# Altium PCB 电源板5.PcbDoc (part 3 of 3)
Units mm, origin at the board's own origin, x right, y up, seen from the top; angles counter-clockwise.
Board outline 181.19 x 72.37 mm, 2 copper layers (Top Layer, Bottom Layer), stack 0.325 mm thick; 121 components, 93 nets, 519 pads, 51 vias.
Unrouted connection lines stored in the file: 1.
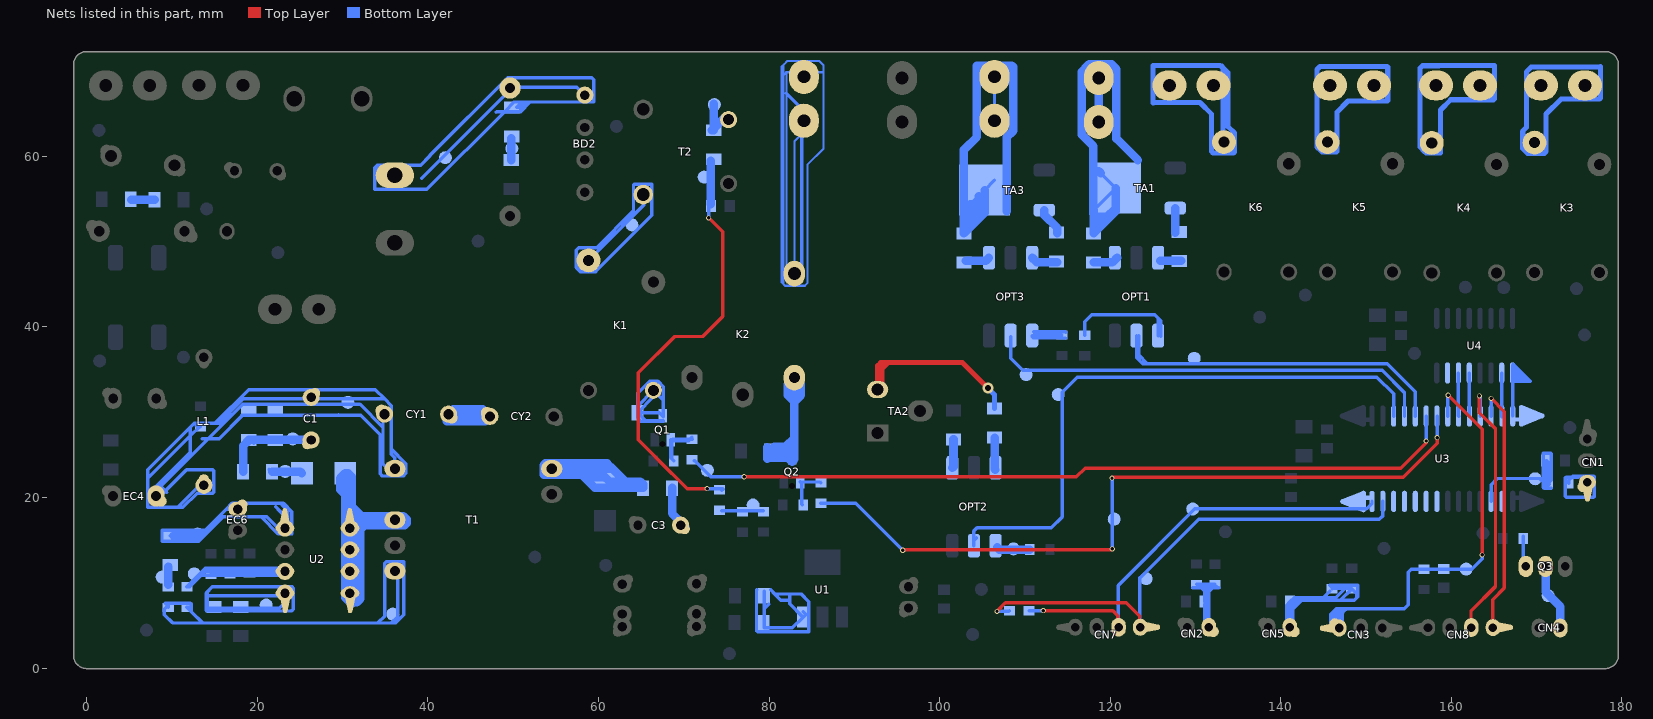
[diagram p3: the nets of this part, all layers, seen from the top]

## Via types
v1: diameter 0.6, hole 0.4, Top Layer to Bottom Layer, 44 vias
v2: diameter 1.27, hole 0.711, Top Layer to Bottom Layer, 7 vias

## Nets (pads, with @x,y where several pads share a name; then routed paths per layer and width w, separated by ;. In a path a pad name is that pad's centre, name@x,y a point inside that pad or via, vN(x,y) a via of type N, cw(c..) or ccw(c..) an arc to the next point about the centre after c; other vN are vias at no path point) (continued)
NetBD2_4: BD2.4 CN9.2 CX2.2 pad.2@42.04,59.846 R7.1 | length 97.9
  Bottom Layer w0.4: 33.927,58.442 33.927,58.825 ; 39.263,57.453 49.931,68.121 57.47,68.121 BD2.4@58.405,67.186 ; 47.982,65.182 48.057,65.257 R7.1@48.987,65.257 ; 33.927,58.825 33.763,58.661 33.763,56.148 39.877,56.148 R7.1@48.987,65.257 ; 33.927,58.825 34.058,58.956 39.144,58.956 40.243,60.056 40.243,60.133 49.339,69.228 59.21,69.228 59.432,69.006 59.432,66.424 59.393,66.385 51.997,66.385 ; R7.1@48.987,65.257 50.115,66.385 51.05,66.385 ; R7.1@48.987,65.257 50.869,65.257 ; 50.869,65.257 51.997,66.385 ; 50.869,65.257 50.869,65.745 ; 50.869,65.745 50.869,65.753 50.924,65.808 50.924,65.857 51.191,66.124 51.198,66.124 51.198,66.237 51.05,66.385 ; 50.869,65.745 50.41,65.745 51.05,66.385 ; 50.869,65.745 51.111,65.745 51.751,66.385 ; 51.05,66.385 51.751,66.385 ; 51.751,66.385 51.997,66.385
NetC1_1: C1.1 pad.2@24.141,26.878 R2.2 R3.2 R10.1 | length 11.6
  Bottom Layer w0.4: R3.2@19.201,26.722 R3.2@19.562,26.362
  Bottom Layer w1: R10.1@18.321,23.031 18.321,26.049 R3.2@18.994,26.722 19.018,26.746 R2.2@22.108,26.746 25.568,26.746 C1.1@25.952,26.362
NetC1_2: C1.2 CY1.1 EC4.1 L1.2@13.732,21.427 L1.2@13.732,21.927 pad.2@30.615,31.158 R2.1 R3.1 R6.2 T1.1 | length 192.1
  Bottom Layer w0.254: EC4.1@8.111,20.173 EC4.1@8.111,20.746
  Bottom Layer w0.4: EC4.1@7.606,20.746 EC4.1@7.936,20.746 ; 9.378,20.584 9.209,20.753 8.95,21.012 8.65,21.313 ; R6.2@13.305,28.304 R6.2@13.216,28.304 ; 13.534,26.9 14.237,26.9 ; L1.2@13.732,20.479 L1.2@13.732,20.501 ; R3.1@18.15,29.627 R3.1@18.253,29.627 ; 23.281,29.627 R2.1@22.108,29.627 ; 29.511,29.713 29.425,29.627 ; CY1.1@34.728,29.991 34.728,28.241 ; T1.1@35.795,22.883 34.728,23.95 34.728,28.241 ; T1.1@36.124,23.378 36.124,24.667 35.707,25.084 35.707,25.683 ; 7.153,22.242 12.137,27.226 ; 7.153,22.242 7.153,23.26 12.137,28.243 ; 7.153,22.242 7.153,18.865 7.171,18.847 8.143,18.847 ; EC4.1@7.936,20.746 7.936,21.102 8.552,21.719 ; EC4.1@7.936,20.746 8.111,20.746 8.111,20.775 8.65,21.313 ; EC4.1@7.936,20.746 7.936,19.997 EC4.1@8.111,20.173 ; EC4.1@8.111,20.173 8.629,20.173 11.688,23.232 14.772,23.232 14.88,23.124 14.88,21.447 ; EC4.1@8.111,20.173 8.111,18.879 8.143,18.847 ; 8.143,18.847 10.653,18.847 ; 8.552,21.719 8.552,21.41 8.65,21.313 ; 8.552,21.719 12.137,25.303 12.137,27.226 ; 8.65,21.313 14.237,26.9 ; 10.653,18.847 L1.2@13.732,21.927 L1.2@13.732,21.427 ; 10.653,18.847 11.269,18.847 12.924,20.501 L1.2@13.732,20.501 ; 12.137,27.226 R6.2@13.216,28.304 ; 12.137,27.226 12.137,28.243 ; 12.137,28.243 12.582,28.689 ; 12.582,28.689 12.966,28.304 R6.2@13.216,28.304 ; 12.582,28.689 15.002,28.689 ; L1.2@13.732,20.501 L1.2@13.732,21.427 ; L1.2@13.732,20.501 14.755,20.501 14.88,20.627 14.88,21.447 ; L1.2@13.732,21.427 14.86,21.427 14.88,21.447 ; 14.237,26.9 15.526,26.9 R3.1@18.253,29.627 ; 14.237,26.9 15.691,28.354 ; 15.002,28.689 18.972,32.658 33.83,32.658 34.922,31.566 ; 15.002,28.689 15.445,28.689 ; 15.445,28.689 18.323,31.566 34.922,31.566 ; 15.445,28.689 15.691,28.689 ; 15.691,28.354 15.691,28.689 ; 15.691,28.354 16.025,28.689 ; 15.691,28.689 16.025,28.689 ; 16.025,28.689 18.267,30.931 32.038,30.931 34.728,28.241 ; R3.1@18.253,29.627 R2.1@22.108,29.627 ; R2.1@22.108,29.627 29.425,29.627 ; 29.425,29.627 32.104,29.627 34.391,27.34 34.391,22.776 34.649,22.518 37.116,22.518 37.425,22.827 37.425,23.965 35.707,25.683 ; 34.922,31.566 35.707,30.781 35.707,25.683
NetC3_1: C3.1 R9.2 | length 5.2
  Bottom Layer w1: R9.2@68.631,21.159 68.631,18.129 C3.1@70.187,16.573
NetC4_2: C4.2 pad.2@12.598,11.048 R14.2 R17.2 R18.2 U2.3 | length 44.8
  Bottom Layer w0.4: R17.2@14.539,11.009 U2.3@22.912,11.009 ; C4.2@19.093,11.236 19.648,11.236 C4.2@19.743,11.331 ; 13.422,10.86 R17.2@13.892,11.331 ; 13.422,10.86 12.089,9.528 R14.2@11.723,9.528 13.526,11.331 ; 13.422,10.86 22.764,10.86 U2.3@22.912,11.009 ; 13.526,11.331 R17.2@13.892,11.331 ; 13.526,11.331 13.888,11.693 20.105,11.693 ; R17.2@13.892,11.331 C4.2@19.743,11.331 ; C4.2@19.743,11.331 20.105,11.693 ; C4.2@19.743,11.331 U2.3@23.234,11.331 ; 20.105,11.693 22.873,11.693 U2.3@23.234,11.331 ; U2.3@22.912,11.009 U2.3@23.234,11.331
NetC5_2: C5.2 CN2.2@131.592,4.771 CN2.2@132.031,4.347 R19.1 R21.1 | length 23.2
  Bottom Layer w0.4: R19.1@129.679,9.399 R19.1@130.715,9.399 ; R19.1@130.137,9.802 R19.1@130.312,9.802 ; C5.2@131.099,7.476 131.099,5.279 CN2.2@131.592,4.787 ; C5.2@131.112,7.776 C5.2@131.112,8.45 ; 131.309,6.661 131.358,6.613 ; CN2.2@131.592,4.771 CN2.2@131.592,4.787 ; CN2.2@132.031,4.347 CN2.2@131.723,4.655 ; R21.1@132.286,9.792 132.276,9.802 R21.1@131.854,9.802 ; R21.1@132.53,9.516 R21.1@132.53,9.399 ; R21.1@132.739,9.399 R21.1@132.53,9.399 ; R19.1@130.312,9.802 R19.1@130.715,9.399 ; R19.1@130.312,9.802 131.148,9.802 ; R19.1@130.715,9.399 131.112,9.002 ; R19.1@130.715,9.399 131.112,9.399 ; C5.2@131.112,8.45 131.112,9.002 ; C5.2@131.112,8.45 131.358,8.696 ; 131.112,9.002 131.112,9.399 ; 131.112,9.399 131.112,9.766 131.148,9.802 ; 131.112,9.399 131.314,9.399 ; 131.148,9.802 R21.1@131.854,9.802 ; 131.314,9.399 131.358,9.355 131.358,8.696 ; 131.314,9.399 131.592,9.399 ; 131.358,6.613 131.592,6.379 ; 131.358,6.613 131.358,5.93 CN2.2@131.592,5.697 ; 131.358,6.613 131.358,8.696 ; 131.358,8.696 131.592,8.929 ; CN2.2@131.592,4.786 131.599,4.779 CN2.2@131.723,4.655 ; CN2.2@131.592,4.786 131.723,4.918 CN2.2@131.723,4.655 ; CN2.2@131.592,4.787 CN2.2@131.592,5.697 ; CN2.2@131.592,5.697 131.592,6.379 ; 131.592,6.379 131.592,8.929 ; 131.592,8.929 131.592,9.399 ; 131.592,8.929 R21.1@132.061,9.399 ; 131.592,9.399 131.592,9.539 R21.1@131.854,9.802 ; 131.592,9.399 R21.1@132.061,9.399 ; R21.1@132.061,9.399 R21.1@132.53,9.399
NetC6_2: C6.2 CN5.2@141.074,4.761 CN5.2@141.514,4.337 R20.1 R22.1 | length 42.4
  Bottom Layer w0.4: CN5.2@141.074,4.439 CN5.2@141.074,4.761 ; CN5.2@141.514,4.337 141.09,4.761 CN5.2@141.074,4.761 ; 145.34,8.55 145.289,8.55 ; R22.1@145.761,9.022 145.289,8.55 ; R22.1@146.033,9.303 R22.1@146.033,9.378 ; 147.601,9.382 147.597,9.378 ; CN5.2@141.074,4.761 C6.2@141.074,7.75 ; CN5.2@141.074,4.761 140.711,5.125 140.711,7.387 C6.2@141.074,7.75 ; CN5.2@141.074,4.761 141.443,5.13 141.443,6.896 ; C6.2@141.074,7.75 C6.2@141.112,7.788 ; C6.2@141.112,7.788 C6.2@141.443,7.457 ; C6.2@141.112,7.788 C6.2@141.21,7.886 ; C6.2@141.21,7.886 141.584,8.26 142.627,8.26 ; C6.2@141.21,7.886 C6.2@141.641,7.886 ; 141.443,6.896 C6.2@141.443,7.457 ; 141.443,6.896 142.489,7.942 ; C6.2@141.443,7.457 141.643,7.457 142.073,7.886 ; C6.2@141.641,7.886 141.697,7.942 142.309,7.942 ; C6.2@141.641,7.886 142.073,7.886 ; 142.073,7.886 142.253,7.886 142.309,7.942 ; 142.309,7.942 142.489,7.942 ; 142.309,7.942 142.627,8.26 ; 142.489,7.942 142.808,8.26 ; 142.489,7.942 143.315,7.942 ; 142.627,8.26 142.808,8.26 ; 142.808,8.26 142.996,8.26 ; 142.996,8.26 143.315,7.942 ; 142.996,8.26 144.999,8.26 ; 143.315,7.942 144.681,7.942 ; 144.681,7.942 144.999,8.26 ; 144.681,7.942 147.018,7.942 ; 144.999,8.26 145.289,8.55 ; 144.999,8.26 146.479,8.26 147.597,9.378 ; R22.1@146.033,9.378 147.597,9.378 ; R22.1@146.033,9.378 146.033,9.437 145.754,9.716 149.067,9.716 149.067,8.375 148.941,8.25 ; 147.018,7.942 R20.1@148.346,9.27 ; 147.018,7.942 148.633,7.942 148.941,8.25 ; 147.597,9.378 148.239,9.378 R20.1@148.346,9.27 ; R20.1@148.346,9.27 R20.1@148.346,9.281 148.941,8.686 148.941,8.25
NetC10_2: C10.2 D6.K pad.2@72.397,57.574 R32.1 | length 52
  Top Layer w0.4: v1(72.742,21.043) 70.408,21.043 68.651,22.8 68.624,22.8 64.653,26.771 64.653,34.604 68.93,38.882 72.211,38.882 74.557,41.228 74.557,51.155 v1(72.923,52.79)
  Bottom Layer w0.4: v1(72.742,21.043) 74.571,21.043 74.628,20.986 R32.1@74.472,20.829 ; v1(72.923,52.79) 72.924,52.791 C10.2@72.924,54.15 ; D6.K@73.145,59.506 D6.K@73.307,59.667
  Bottom Layer w1: C10.2@73.145,54.372 D6.K@73.145,59.506
NetCN1_1: CN1.1 R42.1 | length 13.1
  Bottom Layer w0.4: R42.1@173.807,21.681 173.807,22.029 174.171,22.393 ; 174.92,22.393 174.171,22.393 ; 174.171,22.393 173.465,22.393 173.396,22.324 173.396,20.13 173.517,20.009 176.692,20.009 176.788,20.105 176.788,22.452 176.752,22.488 174.265,22.488 174.171,22.393
NetCN4_2: CN4.2 pad.2@171.365,8.495 Q3.C | length 7.9
  Bottom Layer w1: Q3.C@171.066,11.917 171.066,8.941 172.795,7.212 CN4.2@172.795,4.7
NetCY1_2: CY1.2 CY2.1 | length 17.3
  Bottom Layer w0.4: CY2.1@46.821,29.771 CY2.1@46.934,29.884
  Bottom Layer w1: CY2.1@46.821,29.771 CY1.2@42.416,29.771 ; CY1.2@42.416,29.771 42.98,30.336 46.434,30.336 46.91,29.86 CY2.1@47.267,29.503 46.718,28.954 CY1.2@43.233,28.954 ; CY1.2@42.416,29.771 42.416,29.137 42.233,28.954 CY1.2@43.233,28.954 ; CY1.2@42.416,29.771 CY1.2@43.233,28.954
NetD1_A: D1.A R9.1 T1.10 | length 52
  Bottom Layer w0.4: D1.A@60.139,23.378 D1.A@61.089,22.428
  Bottom Layer w1: T1.10@53.594,23.378 53.572,23.401 53.572,23.799 53.771,23.998 61.013,23.998 D1.A@61.633,23.378 ; T1.10@53.594,23.378 T1.10@54.524,23.378 ; T1.10@53.594,23.378 53.594,22.663 53.583,22.652 58.052,22.652 ; T1.10@54.524,23.378 54.947,22.956 54.947,22.805 56.355,22.805 56.371,22.822 57.883,22.822 ; T1.10@54.524,23.378 57.326,23.378 ; 57.326,23.378 57.883,22.822 ; 57.326,23.378 D1.A@59.772,23.378 ; 57.883,22.822 D1.A@60.329,22.822 ; 57.883,22.822 58.052,22.652 ; 58.052,22.652 58.933,22.652 59.286,22.299 59.353,22.367 D1.A@60.783,22.367 ; 58.052,22.652 59.545,21.159 D1.A@61.991,21.159 ; D1.A@59.772,23.378 D1.A@60.329,22.822 ; D1.A@59.772,23.378 60.139,23.378 D1.A@61.633,23.378 ; D1.A@60.329,22.822 D1.A@60.783,22.367 ; D1.A@60.783,22.367 D1.A@61.282,21.868 ; D1.A@61.282,21.868 D1.A@61.991,21.159 ; D1.A@61.282,21.868 63.143,21.868 ; D1.A@61.633,23.378 63.143,21.868 ; D1.A@61.991,21.159 63.852,21.159 ; 63.143,21.868 63.852,21.159 ; 63.143,21.868 64.905,21.868 65.231,21.542 65.231,21.159 63.852,21.159
NetD2_A: D2.A pad.2@33.434,17.233 T1.3 U2.5 U2.6 U2.7 U2.8 | length 73.7
  Bottom Layer w0.254: U2.8@30.838,17.501 30.854,17.485 U2.8@30.961,17.378
  Bottom Layer w0.4: U2.5@30.854,8.791 U2.6@30.854,11.331 U2.7@30.854,13.871 U2.8@30.854,16.411
  Bottom Layer w1: U2.5@31.06,7.523 U2.5@31.237,7.7 ; 30.307,20.344 30.307,8.264 U2.5@30.871,7.7 U2.5@31.237,7.7 ; 30.307,20.344 29.716,20.935 29.716,22.251 D2.A@30.307,22.842 ; 30.307,20.344 D2.A@30.307,22.842 ; D2.A@30.307,22.842 30.644,22.842 31.065,22.42 31.065,18.949 32.19,17.824 T1.3@35.678,17.824 ; U2.8@31.023,16.579 31.822,17.378 T1.3@36.124,17.378 ; U2.8@31.023,16.579 31.023,15.61 31.446,15.187 31.446,7.909 U2.5@31.237,7.7 ; U2.8@31.023,16.579 U2.8@31.023,17.676 30.854,17.508 30.854,17.485 U2.8@30.854,16.411 U2.8@31.023,16.579 ; U2.5@31.237,7.7 31.671,7.7 32.085,8.115 32.085,16.265 32.566,16.746 T1.3@35.492,16.746 ; T1.3@35.492,16.746 T1.3@36.124,17.378 ; T1.3@35.492,16.746 37.254,16.746 37.493,16.984 37.493,17.442 ; T1.3@35.678,17.824 T1.3@36.124,17.378 ; T1.3@35.678,17.824 37.11,17.824 37.493,17.442 ; T1.3@36.124,17.378 37.429,17.378 37.493,17.442
NetD2_K: D2.K pad.2@23.262,23.061 R10.2 | length 3.9
  Bottom Layer w0.4: R10.2@21.362,23.3 R10.2@21.568,23.095
  Bottom Layer w1: R10.2@21.721,23.031 25.037,23.031 D2.K@25.227,22.842
NetD3_A: D3.A pad.2@8.825,10.665 R13.1 | length 2.4
  Bottom Layer w0.4: D3.A@9.539,11.874 D3.A@9.764,12.099
  Bottom Layer w1: R13.1@9.539,9.769 D3.A@9.539,11.874
NetD3_K: D3.K EC6.1 pad.2@12.997,15.711 U2.1 | length 60.8
  Bottom Layer w0.4: 14.231,15.99 14.02,15.779 ; EC6.1@17.688,18.637 16.354,18.637 ; 22.153,18.926 U2.1@23.403,17.676 ; 22.399,18.646 U2.1@22.985,18.06 ; 22.927,19.075 23.569,18.433 23.569,16.745 U2.1@23.234,16.411 22.428,16.411 21.098,17.74 20.446,17.74 ; D3.K@9.764,15.499 13.74,15.499 ; D3.K@9.764,15.499 10.044,15.779 14.02,15.779 ; D3.K@9.764,15.499 10.095,15.168 12.826,15.168 12.828,15.167 pad.2@13.407,15.167 ; pad.2@13.407,15.167 13.121,14.88 8.815,14.88 8.815,16.147 13.864,16.147 16.354,18.637 ; pad.2@13.407,15.167 13.74,15.499 ; 13.74,15.499 14.02,15.779 ; 14.02,15.779 15.981,17.74 20.446,17.74 ; 16.354,18.637 17.025,19.307 23.068,19.307 24.032,18.343 24.032,15.72 24.026,15.714 22.472,15.714 20.446,17.74
NetD4_A: D4.A K2.2 Q2.C | length 31.4
  Bottom Layer w1: D4.A@79.785,25.872 79.785,24.538 79.891,24.644 80.938,24.644 ; D4.A@80.127,25.6 D4.A@80.127,25.455 ; Q2.C@82.709,24.644 Q2.C@82.265,24.644 ; 83.265,31.579 82.974,31.87 ; D4.A@80.127,25.455 81.454,25.455 ; D4.A@80.127,25.455 80.938,24.644 ; D4.A@80.127,25.455 80.638,25.966 81.96,25.966 82.974,26.979 ; 80.938,24.644 Q2.C@82.265,24.644 ; 81.454,25.455 82.027,25.455 82.974,26.401 ; 81.454,25.455 Q2.C@82.265,24.644 ; Q2.C@82.265,24.644 82.709,24.199 82.974,24.464 82.974,26.401 ; 82.974,26.401 82.974,26.979 ; 82.974,26.979 82.974,31.209 ; 82.974,31.209 83.746,31.981 83.746,33.285 K2.2@82.974,34.058 ; 82.974,31.209 82.974,31.87 ; 82.974,31.209 82.216,31.966 82.216,33.3 K2.2@82.974,34.058 ; 82.974,31.87 K2.2@82.974,34.058
NetD5_A: D5.A K1.2 Q1.C | length 27.8
  Bottom Layer w0.4: D5.A@64.591,29.949 66.437,31.794 K1.2@66.437,32.568 ; D5.A@64.591,29.949 65.536,29.004 67.619,29.004 67.578,28.964 64.977,28.964 64.591,29.35 D5.A@64.591,29.949 ; D5.A@64.591,29.949 67.147,29.949 67.619,29.476 67.619,31.386 ; D5.A@64.591,29.949 D5.A@64.591,30.722 ; D5.A@64.591,30.722 K1.2@66.437,32.568 ; D5.A@64.591,30.722 64.591,32.202 66.011,33.622 66.986,33.622 67.619,32.989 67.619,31.386 ; K1.2@66.437,32.568 67.619,31.386
NetD6_A: D6.A pad.2@73.589,66.075 T2.1 | length 5.7
  Bottom Layer w1: D6.A@73.307,63.067 D6.A@73.54,63.301 ; pad.2@73.521,66.165 73.54,66.146 D6.A@73.54,63.301 ; D6.A@73.54,63.067 D6.A@73.54,63.301 ; T2.1@75.252,64.558 74.798,64.558 D6.A@73.54,63.301
NetK1_2: K1.4 pad.2@63.925,51.973 T2.4 | length 48.2
  Bottom Layer w0.4: 57.456,48.132 57.387,48.201 ; K1.4@58.845,46.511 K1.4@58.846,46.51 ; 59.691,46.487 57.87,46.487 57.505,46.853 ; 60.343,49.315 60.258,49.229 ; T2.4@65.344,55.52 65.344,54.315 60.258,49.229 ; 57.387,48.201 57.387,49.012 57.673,49.298 59.784,49.298 64.106,53.62 64.106,56.618 64.206,56.718 66.255,56.718 66.255,56.601 66.271,56.585 66.271,53.091 59.698,46.517 ; 57.387,48.201 57.387,46.97 57.505,46.853 ; 57.505,46.853 K1.4@58.058,46.853 ; K1.4@58.058,46.853 K1.4@58.808,46.853 ; K1.4@58.058,46.853 58.058,47.029 K1.4@58.837,47.808 ; K1.4@58.808,46.853 58.472,46.517 59.698,46.517 ; K1.4@58.808,46.853 58.837,46.881 K1.4@58.837,47.808 ; K1.4@58.808,46.853 59.362,46.853 59.698,46.517 ; K1.4@58.837,47.808 60.258,49.229
NetK2_2: K2.4 KG1.1 | length 155
  Bottom Layer w0.254: 81.517,45.692 81.479,45.653 ; 82.031,69.866 82.031,69.864 81.712,69.545 ; 82.224,44.838 81.874,44.838 ; KG1.1@83.798,62.563 82.974,61.738 K2.4@82.974,46.258 81.712,46.258 ; 81.479,45.653 81.479,45.233 81.712,45 ; 81.479,45.653 81.479,70.534 81.712,70.767 ; 81.712,45 81.712,46.258 ; 81.712,45 81.712,44.994 81.867,44.838 81.874,44.838 ; 81.712,45 81.874,44.838 ; 81.712,46.258 81.712,46.365 ; 81.712,46.365 82.047,46.7 82.047,67.406 82.047,69.874 86.39,69.874 ; 81.712,46.365 81.712,69.545 ; 81.712,69.545 81.712,70.767 ; 81.712,70.767 82.129,71.184 85.873,71.184 85.876,71.187 86.39,70.673 86.39,69.874 ; 81.874,44.838 84.206,44.838 84.503,45.134 84.503,59.025 86.408,60.93 86.408,69.892 86.39,69.874
  Bottom Layer w0.4: 82.047,67.406 83.857,65.595 K2.4@83.857,46.258
NetK3_2: K3.4 KG10.1 | length 40.5
  Bottom Layer w0.4: KG10.1@169.567,67.806 KG10.1@170.531,68.77
  Bottom Layer w0.6: 168.393,62.902 168.393,62.569 168.588,62.374 168.588,62.098 168.393,61.903 K3.4@168.393,61.569 ; K3.4@169.567,61.668 168.491,61.668 K3.4@168.393,61.569 ; K3.4@168.393,61.569 168.393,60.921 168.949,60.364 170.914,60.364 171.13,60.581 171.13,64.968 172.872,66.71 177.391,66.71 177.524,66.842 177.524,70.524 177.48,70.48 169.388,70.48 168.815,69.907 168.815,63.381 168.374,62.94 168.374,61.551 K3.4@168.393,61.569
NetK4_2: K4.4 KG4.1 | length 39.7
  Bottom Layer w0.4: KG4.1@157.499,68.027 KG4.1@158.239,68.766
  Bottom Layer w0.6: 156.35,62.395 156.348,62.395 K4.4@156.348,61.478 ; K4.4@156.944,60.511 156.335,61.119 K4.4@156.335,61.465 ; K4.4@156.977,60.478 157.078,60.377 158.742,60.377 158.742,65.43 159.95,66.638 164.941,66.638 165.061,66.758 165.061,70.647 158.588,70.647 158.567,70.627 156.623,70.627 156.335,70.339 K4.4@156.335,61.465 ; K4.4@157.499,61.585 156.455,61.585 K4.4@156.348,61.478 ; K4.4@156.335,61.465 K4.4@156.348,61.478
NetK5_2: K5.4 KG5.1 | length 37.4
  Bottom Layer w0.4: KG5.1@145.41,68.144 KG5.1@145.785,68.519
  Bottom Layer w0.6: 144.262,63.577 144.258,63.574 144.258,62.32 144.257,62.321 ; K5.4@144.774,60.601 144.257,61.118 144.257,62.321 ; K5.4@144.857,60.526 146.518,60.526 146.601,60.609 146.601,65.176 147.915,66.49 152.501,66.49 152.567,66.556 152.567,70.459 152.479,70.546 144.615,70.546 144.257,70.189 144.257,62.321 ; K5.4@144.905,61.674 K5.4@145.41,61.674
NetK6_2: K6.4 KG6.1 | length 48.2
  Bottom Layer w0.4: KG6.1@132.112,68.329 KG6.1@133.261,67.18
  Bottom Layer w0.6: 125.055,66.278 125.055,70.641 132.912,70.641 133.261,70.291 133.261,67.18 K6.4@133.261,61.674 ; 125.056,66.278 125.096,66.318 130.548,66.318 131.911,64.955 131.911,60.564 132.066,60.409 134.471,60.409 134.58,60.518 134.58,62.741 133.851,63.47 133.851,69.814 133.093,70.572
NetKG3_1: KG3.1 R36.2 TA3.2 | length 63.8
  Bottom Layer w0.4: TA3.2@102.866,53.628 103.632,54.394 104.571,55.333 TA3.2@105.281,56.043 TA3.2@106.441,57.203 ; KG3.1@106.441,63.716 KG3.1@106.441,68.867
  Bottom Layer w1: TA3.2@103.632,54.394 103.632,52.57 103.652,52.59 103.672,52.59 102.866,51.784 ; TA3.2@104.571,55.333 104.571,52.673 ; TA3.2@105.281,56.043 105.281,53.383 104.571,52.673 ; TA3.2@107.868,53.565 107.868,62.231 108.643,63.006 108.643,70.498 108.492,70.649 104.377,70.649 104.377,62.282 102.866,60.771 102.866,53.628 102.866,51.784 ; 102.866,51.784 R36.2@102.866,50.968 104.571,52.673
NetKG12_1: KG12.1 R40.2 TA1.2 | length 69.1
  Bottom Layer w0.4: TA1.2@118.064,53.707 TA1.2@120.644,56.287 TA1.2@118.896,58.035 ; KG12.1@118.896,63.992 KG12.1@118.896,69.143
  Bottom Layer w1: TA1.2@118.021,53.293 118.021,61.213 116.688,62.546 116.688,69.949 117.264,70.525 ; TA1.2@118.064,53.707 R40.2@118.064,51.308 ; 118.565,52.829 118.65,52.915 119.67,52.915 ; TA1.2@118.675,58.256 TA1.2@118.896,58.035 ; KG12.1@118.675,64.028 KG12.1@118.675,69.18 KG12.1@118.675,70.525 ; TA1.2@120.644,56.287 TA1.2@120.644,53.888 ; 123.266,59.562 120.734,62.094 120.734,70.242 120.451,70.525 ; 117.264,70.525 KG12.1@118.675,70.525 ; 117.264,70.525 117.539,70.8 KG12.1@118.483,70.8 ; R40.2@118.064,51.308 R40.2@118.064,50.969 120.644,53.549 TA1.2@120.644,53.888 ; R40.2@118.064,51.308 119.67,52.915 ; KG12.1@118.483,70.8 118.675,70.608 KG12.1@118.675,70.525 ; KG12.1@118.483,70.8 120.176,70.8 120.451,70.525 ; KG12.1@118.675,70.525 120.451,70.525 ; 119.67,52.915 TA1.2@120.644,53.888
NetOPT1_1: OPT1.1 R38.1 | length 15
  Bottom Layer w0.4: R38.1@117.027,39.034 117.027,40.611 117.846,41.431 125.246,41.431 125.64,41.037 ; OPT1.1@125.64,38.982 125.64,41.037 ; OPT1.1@125.957,38.884 125.957,40.72 125.64,41.037
NetOPT1_4: OPT1.4 R40.1 | length 3
  Bottom Layer w1: R40.1@118.064,47.569 120.271,47.569 OPT1.4@120.821,48.119
NetOPT1_6: OPT1.6 R41.1 | length 2.5
  Bottom Layer w1: OPT1.6@125.901,47.782 R41.1@128.373,47.782
NetOPT2_1: OPT2.1 pad.2@108.674,13.978 R27.1 | length 3.9
  Bottom Layer w1: OPT2.1@106.757,14.162 107.031,13.888 R27.1@110.56,13.888
NetOPT2_4: OPT2.4 R29.1 | length 3.4
  Bottom Layer w1: OPT2.4@101.495,23.481 101.637,23.623 R29.1@101.637,26.803
NetOPT2_6: OPT2.6 R33.1 | length 3.8
  Bottom Layer w1: R33.1@106.451,27.013 106.451,23.33 OPT2.6@106.535,23.246
NetOPT3_1: OPT3.1 R35.1 | length 12.4
  Bottom Layer w0.4: OPT3.1@110.876,38.851 OPT3.1@110.885,38.86 ; OPT3.1@110.876,38.982 110.876,38.869 OPT3.1@110.885,38.86 ; OPT3.1@111.052,39.421 113.53,39.421 ; R35.1@114.775,38.689 114.766,38.699 R35.1@113.991,38.699 ; R35.1@114.777,39.395 114.751,39.421 113.53,39.421 ; OPT3.1@110.885,38.86 111.047,38.699 R35.1@113.991,38.699 ; OPT3.1@110.885,38.86 111.083,39.057 R35.1@113.894,39.057 ; 113.53,39.421 R35.1@113.894,39.057 ; R35.1@113.894,39.057 R35.1@114.35,39.057 R35.1@113.991,38.699
NetOPT3_4: OPT3.4 R36.1 | length 3.9
  Bottom Layer w0.254: R36.1@102.866,47.568 R36.1@103.064,47.767
  Bottom Layer w0.4: OPT3.4@105.246,47.568 OPT3.4@105.796,48.119
  Bottom Layer w1: R36.1@103.064,47.767 105.445,47.767 OPT3.4@105.796,48.119
NetOPT3_6: OPT3.6 R39.1 | length 3.2
  Bottom Layer w1: OPT3.6@110.876,48.119 111.382,47.613 R39.1@113.821,47.613
NetQ1_1: Q1.B R28.2 R43.2 | length 9.8
  Bottom Layer w0.4: Q1.B@68.484,26.765 68.484,24.632 R43.2@68.571,24.545 ; R43.2@68.825,24.291 R43.2@68.571,24.545 ; R28.2@70.968,27.045 R28.2@70.731,26.808 ; R28.2@70.991,26.808 R28.2@70.731,26.808 ; R43.2@68.571,24.545 Q1.B@68.571,26.676 ; Q1.B@68.571,26.676 70.599,26.676 R28.2@70.731,26.808 ; Q1.B@68.571,26.676 68.703,26.808 R28.2@70.731,26.808
NetQ2_1: Q2.B R8.2 R23.2 | length 5.3
  Bottom Layer w0.4: R23.2@83.888,19.136 83.827,19.197 83.827,21.679 Q2.B@83.661,21.844 83.689,21.816 85.985,21.816 R8.2@86.092,21.708
NetQ3_1: Q3.B R25.1 | length 3.7
  Bottom Layer w0.4: R25.1@168.473,15.486 168.473,12.209 Q3.B@168.766,11.917
NetR1_1: R1.1 R5.1 U1.3 | length 36
  Bottom Layer w0.4: 78.566,9.18 78.529,9.143 78.529,4.361 78.656,4.234 84.64,4.234 84.677,4.272 84.677,7.786 83.781,8.682 82.438,8.682 ; R1.1@79.435,9.001 79.435,6.965 ; 79.958,7.488 79.435,6.965 ; 80.19,9.171 80.678,8.682 ; U1.3@83.975,5.981 82.438,7.518 82.438,7.963 ; U1.3@84.01,6.577 84.308,6.279 83.992,5.964 82.739,4.71 79.435,4.71 79.435,6.965 ; 80.678,8.682 82.438,8.682 ; 80.678,8.682 81.398,7.963 82.438,7.963 ; 82.438,7.963 82.438,8.682
NetR4_2: R4.2 R12.1 | length 2.8
  Bottom Layer w0.4: R4.2@5.147,54.971 R4.2@5.207,54.91
  Bottom Layer w1: R4.2@5.207,54.91 R12.1@7.956,54.91
NetR7_2: pad.2@49.84,60.929 R7.2 R26.1 | length 2.8
  Bottom Layer w0.4: R7.2@49.628,62.31 R7.2@49.781,62.156
  Bottom Layer w1: R26.1@49.781,59.564 R7.2@49.781,62.156
NetR13_2: pad.2@35.881,6.321 R13.2 R14.1 T1.5 | length 61.1
  Bottom Layer w0.4: R13.2@9.539,7.369 9.068,6.898 9.068,6.264 10.047,5.285 13.509,5.285 ; R13.2@9.549,7.105 9.549,7.26 9.49,7.319 9.217,7.592 12.108,7.592 12.243,7.457 R14.1@12.243,6.608 ; 12.382,6.469 13.509,5.342 13.509,5.285 ; T1.5@36.124,11.378 34.92,11.378 T1.5@34.914,11.372 ; T1.5@36.476,10.815 36.476,6.037 35.724,5.285 ; R14.1@12.243,6.608 R14.1@11.723,7.128 12.243,7.128 R14.1@12.243,6.608 ; 13.509,5.285 34.125,5.285 ; 34.125,5.285 34.914,6.074 T1.5@34.914,11.372 ; 34.125,5.285 35.724,5.285 ; T1.5@34.914,11.372 34.914,12.274 35.107,12.467 37.133,12.467 37.155,12.444 37.155,6.233 36.207,5.285 35.724,5.285
NetR15_1: pad.2@21.033,7.393 R15.1 R16.2 U2.4 | length 47.2
  Bottom Layer w0.4: 14.692,9.508 13.985,8.801 13.985,6.744 14.041,6.688 23.999,6.688 24.223,6.911 24.223,9.362 24.072,9.513 14.722,9.513 14.138,8.928 14.138,8.361 ; U2.4@22.413,8.538 U2.4@22.489,8.462 ; 14.138,8.361 14.239,8.462 U2.4@22.489,8.462 ; 14.138,8.361 14.138,6.969 14.166,6.997 22.547,6.997 U2.4@23.251,7.7 U2.4@22.489,8.462
NetR32_2: pad.2@78.128,19.123 R32.2 R34.2 R37.1 | length 4.9
  Bottom Layer w0.4: R32.2@74.472,18.429 R34.2@79.348,18.429
NetR33_2: R33.2 TA2.3 | length 25.2
  Top Layer w0.4: TA2.3@92.74,32.647 TA2.3@92.74,33.328
  Top Layer w0.6: TA2.3@92.74,32.647 93.263,33.17 93.263,35.106 ; TA2.3@92.74,33.328 92.74,35.445 93.108,35.813 ; 94.827,35.813 93.969,35.813 ; v2(105.685,32.821) 102.693,35.813 93.969,35.813 ; 93.108,35.813 93.969,35.813 ; 93.108,35.813 93.263,35.658 93.263,35.106 ; 93.263,35.106 93.969,35.813
  Bottom Layer w0.6: v2(105.685,32.821) 106.451,32.056 R33.2@106.451,30.413
NetR39_2: R39.2 TA3.3 | length 3.3
  Bottom Layer w1: TA3.3@112.281,53.693 112.281,53.13 113.821,51.589 R39.2@113.821,51.013
NetR41_2: R41.2 TA1.3 | length 2.9
  Bottom Layer w1: R41.2@127.644,51.03 TA1.3@127.644,53.937
P0.0: U3.26
P0.1: U3.25
P0.2: U3.23
P0.3: U3.22
P2.4: U3.24
PLUS: C9.1 CN3.1 pad.2@161.762,11.599 R24.1 U3.8 | length 57.5
  Top Layer w0.4: v1(159.645,31.991) 163.624,28.012 v1(163.626,13.273) v1(163.626,13.273)
  Bottom Layer w0.4: CN3.1@145.856,4.676 145.856,6.291 146.525,6.96 147.732,6.96 ; CN3.1@146.115,5.567 146.115,6.182 146.072,6.225 146.491,6.643 146.731,6.643 ; CN3.1@146.363,5.738 146.363,6.079 146.525,6.242 146.633,6.242 146.731,6.34 ; CN3.1@146.405,5.192 CN3.1@146.405,5.651 ; CN3.1@146.731,5.225 146.731,6.34 ; CN3.1@146.919,5.096 147.03,5.208 147.03,6.639 ; CN3.1@147.18,4.243 147.255,4.318 147.255,6.483 147.411,6.639 ; U3.8@159.605,29.546 159.605,31.952 v1(159.645,31.991) ; v1(163.626,13.273) 163.626,12.794 162.432,11.6 C9.1@159.129,11.6 155.324,11.6 154.965,11.241 154.965,7.442 154.483,6.96 147.732,6.96 ; 146.731,6.34 147.03,6.639 ; 146.731,6.34 146.731,6.643 ; 146.731,6.643 146.735,6.639 147.03,6.639 ; 147.03,6.639 147.411,6.639 ; 147.411,6.639 147.732,6.96
PRESS: C14.1 pad.2@169.847,22.194 R42.2 U3.17 | length 26
  Bottom Layer w0.4: U3.17@164.685,19.546 164.685,21.499 165.408,22.223 pad.2@170.412,22.223 ; R42.2@171.064,21.761 171.153,21.85 R42.2@171.153,21.913 ; R42.2@171.407,21.681 R42.2@171.584,21.859 ; R42.2@171.422,22.021 R42.2@171.584,21.859 ; R42.2@171.449,22.222 171.484,22.257 171.484,24.006 C14.1@171.153,24.338 R42.2@171.153,22.223 ; R42.2@171.468,21.166 170.805,21.829 ; R42.2@171.522,21.544 R42.2@171.153,21.913 ; R42.2@171.731,21.109 171.715,21.093 170.887,21.093 170.805,21.174 170.805,21.829 ; pad.2@170.412,22.223 170.805,22.223 ; pad.2@170.412,22.223 170.645,21.99 ; 170.645,21.99 170.805,21.99 ; 170.645,21.99 170.805,21.829 ; 170.805,21.829 170.805,21.99 ; 170.805,21.99 170.805,22.223 ; 170.805,21.99 171.077,21.99 R42.2@171.153,21.913 ; 170.805,22.223 170.805,25.195 171.697,25.195 171.76,25.132 171.76,22.034 R42.2@171.584,21.859 ; 170.805,22.223 R42.2@171.153,22.223 ; R42.2@171.153,21.913 R42.2@171.153,22.223
RL1: pad.2@72.772,23.191 R28.1 U3.6 | length 91.4
  Top Layer w0.4: v1(77.085,22.43) 116.049,22.43 117.064,23.445 154.1,23.445 157.058,26.403 v1(157.058,26.627)
  Bottom Layer w0.4: R28.1@71.211,24.293 71.312,24.293 73.175,22.43 v1(77.085,22.43) ; v1(157.058,26.627) 157.058,29.539 U3.6@157.065,29.546
RL2: pad.2@120.486,17.455 R8.1 U3.7 | length 87.8
  Top Layer w0.4: v1@95.683,13.858 120.143,13.858 v1(120.261,13.976) ; v1(120.221,22.273) 120.328,22.38 154.375,22.38 158.361,26.367 v1(158.361,27.014)
  Bottom Layer w0.4: R8.1@86.092,19.308 90.188,19.308 v1(95.683,13.813) ; v1(120.221,22.273) 120.261,22.233 v1(120.261,13.976) ; U3.7@158.335,29.546 158.361,29.52 v1(158.361,27.014)
RL3: U3.14 U4.1 | length 17.4
  Bottom Layer w0.4: U3.14@167.225,29.555 167.203,29.577 U4.1@167.203,34.602 167.203,35.511 167.294,35.601 169.258,33.636 169.258,33.605 168.748,33.605 ; U4.1@167.262,33.647 167.304,33.605 167.863,33.605 ; U4.1@167.399,35.172 167.399,35.059 168.748,33.709 168.748,33.605 ; 167.569,34.147 167.569,34.091 167.689,33.971 168.077,33.971 168.423,33.625 168.423,33.674 167.442,34.656 167.442,34.027 167.863,33.605 ; 168.501,33.605 167.863,33.605 ; 167.863,33.605 168.748,33.605
RL4: U3.13 U4.2 | length 5.1
  Bottom Layer w0.4: U3.13@165.933,29.461 U4.2@165.933,34.602
RL5: U3.10 U4.5 | length 5.1
  Bottom Layer w0.4: U4.5@162.123,34.602 162.123,29.568 U3.10@162.145,29.546
RL6: U3.9 U4.6 | length 5.1
  Bottom Layer w0.4: U4.6@160.853,34.602 160.853,29.568 U3.9@160.875,29.546
RL7: U4.7
RXD: CN7.3 pad.2@129.693,18.65 R31.2 U3.28 | length 53.1
  Top Layer w0.4: v1(112.167,6.731) 120.34,6.731 120.915,6.156 ; CN7.3@120.915,4.777 120.915,6.156 ; CN7.3@120.915,4.783 120.915,6.156
  Bottom Layer w0.4: R31.2@110.495,6.736 112.162,6.736 v1(112.167,6.731) ; CN7.3@120.582,5.298 CN7.3@120.589,5.305 ; CN7.3@120.915,3.942 CN7.3@120.915,4.777 ; CN7.3@120.941,4.839 120.941,9.68 129.942,18.68 150.076,18.68 150.72,19.325 U3.28@150.72,19.539
RXD0: CN8.3 U3.11 | length 31.5
  Top Layer w0.4: CN8.3@162.332,4.807 162.332,6.698 165.197,9.563 165.197,28.04 163.317,29.919 v1(163.317,31.908)
  Bottom Layer w0.4: v1(163.317,31.908) 163.415,31.81 U3.11@163.415,29.546
SCR1: OPT2.2 pad.2@113.919,32.072 U3.3 | length 70.9
  Bottom Layer w0.4: OPT2.2@104.035,14.344 104.035,16.067 104.394,16.427 113.097,16.427 114.377,17.708 114.377,18.95 ; OPT2.2@104.074,14.998 OPT2.2@104.338,15.262 ; 114.381,18.86 114.381,32.329 116.157,34.105 151.299,34.105 153.255,32.149 U3.3@153.255,29.546
SCR2: OPT3.2 pad.2@110.159,34.402 U3.4 | length 53.1
  Bottom Layer w0.4: OPT3.2@108.336,38.851 108.336,36.35 109.781,34.905 151.896,34.905 154.525,32.276 U3.4@154.525,29.546
SCR3: OPT1.2 pad.2@129.869,36.322 U3.5 | length 43.5
  Bottom Layer w0.4: OPT1.2@123.1,38.982 123.1,36.449 123.844,35.705 124.38,35.705 ; OPT1.2@123.361,38.982 123.361,36.723 124.38,35.705 ; 124.915,35.705 124.903,35.705 ; U3.5@155.795,29.546 155.795,32.403 152.493,35.705 124.903,35.705 ; 124.38,35.705 124.903,35.705
SW1: U3.16
TXD: CN7.4@123.533,4.782 CN7.4@124.8,4.988 CN7.4@124.623,4.799 CN7.4@124.798,4.614 pad.2@124.233,10.478 R30.2 U3.27 | length 66.1
  Top Layer w0.4: v1(106.738,6.637) 107.731,7.631 121.906,7.631 123.455,6.082 CN7.4@123.455,4.777
  Bottom Layer w0.4: v1(106.738,6.637) 108.138,6.637 R30.2@108.204,6.704 ; CN7.4@123.455,4.777 123.455,10.573 123.481,10.6 ; CN7.4@123.481,4.839 123.481,10.6 ; 151.152,17.426 150.459,17.426 150.456,17.429 ; 151.985,17.797 151.985,17.829 ; U3.27@151.985,19.546 151.985,17.829 ; 151.992,17.836 151.985,17.829 ; 123.481,10.6 123.563,10.6 130.391,17.429 150.456,17.429 ; 150.456,17.429 151.585,17.429 151.985,17.829
TXD0: CN8.4@164.904,4.747 CN8.4@165.994,4.763 CN8.4@166.169,4.579 CN8.4@166.171,4.953 U3.12 | length 30.4
  Top Layer w0.4: v1(164.69,31.627) 166.238,30.079 166.238,9.382 164.872,8.015 CN8.4@164.872,4.807
  Bottom Layer w0.254: CN8.4@164.807,4.865 CN8.4@165.018,5.077
  Bottom Layer w0.4: U3.12@164.685,29.546 164.685,31.566 164.666,31.585 164.666,31.603 v1(164.69,31.627)
pads on no net: 1.0 2.0 CN1.0 CN1.3@175.969,26.857 CN2.0 CN2.2@131.592,4.771 CN3.0 CN3.3@151.946,4.692 CN4.1@172.795,4.7 CN5.0 CN5.2@141.074,4.761 CN7.0 CN7.4@123.533,4.782 CN8.0 CN8.4@164.904,4.747 L1.1@13.732,35.927 L1.1@13.732,36.427 L1.2@13.732,21.427 L1.2@13.732,21.927 OPT1.3 OPT1.5 OPT2.3 OPT2.5 OPT3.3 OPT3.5 Q1.0 Q2.0 T1.2 U1.0 U2.0 U2.22 U3.0 U4.3 U4.4 U4.13 U4.14
copper on no net: | length 7.2
  Top Layer w0.2: 111.231,58.083 111.967,57.346 112.773,57.346 113.326,57.899 113.326,59.962 112.805,60.482 111.656,60.482
  Top Layer w1: 73.481,11.274 73.556,11.349 73.922,11.349
  Bottom Layer w0.254: 84.354,45.12 84.354,45.232

## Keep-outs
Keep-Out Layer:
  circle w0.127: c139.25,68.078 r1.6
  circle w0.127: c39.25,68.078 r1.6
  circle w0.127: c53.362,5 r1.6
  circle w0.127: c139.25,12.938 r1.6
  lines w0.127: 0,-0.006 175.081,-0.006 178.073,-0.006 ; 0,0 cw(c0,1.5) -1.5,1.5 -1.5,8.738 -1.5,70.738 cw(c0,70.738) 0,72.238 167,72.238 178.06,72.238 cw(c178.06,70.738) 179.56,70.738 179.56,3.596 179.56,1.404 ; 178.06,-0.006 ccw(c178.06,1.494) 179.56,1.494
  lines w1.2: 90.742,35.957 90.742,31.172 91.515,30.399 93.289,30.399
  lines w1.5: 5.902,46.237 5.902,50.702 ; 19.768,55.738 19.768,59.906 ; 55.213,46.431 56.682,44.963 61.436,44.963 65.57,49.096 ; 55.538,51.709 59.875,51.709 62.333,54.167 62.333,56.728 ; 56.3,65.351 60.123,65.351 ; 56.469,57.74 59.846,57.752 ; 56.47,61.567 60.293,61.567 ; 99.397,20.643 109.299,20.643 ; 103.474,44.947 127.976,44.947 ; 130.216,62.181 130.216,60.115 131.503,58.827 134.723,58.827 ; 142.999,62.907 142.999,60.612 144.665,58.947 147.093,58.947 ; 155.154,62.64 155.154,60.532 156.659,59.028 159.62,59.028 ; 167.234,62.782 167.234,60.467 168.658,59.042 171.689,59.042
  lines w2: 32.582,46.251 47.586,46.251 ; 33.09,60.718 38.643,60.718 ; 37.988,32.748 37.988,27.141 40.198,24.931 ; 50.113,23.737 50.113,32.564 ; 69.837,36.89 72.435,36.89 ; 72.725,36.835 73.732,35.827 73.732,30.127 74.872,28.988 79.481,28.988 80.307,29.813 80.307,36.228 81.115,37.036 84.348,37.036 85.802,35.583 85.802,26.382 87.508,24.676 95.059,24.676 ; 78.766,62.625 78.766,66.905 ; 78.849,51.988 78.849,58.133 ; 80.11,43.31 85.976,43.31 ; 130.866,51.038 130.866,42.68 131.963,41.583
  lines w3.2: 127.661,30.129 135.38,30.129

## Other copper
Top Layer:
  region net NetBD2_3: 30.771,67.925 32.889,67.925 36.6,64.214 43.301,64.214 47.351,60.523 57.087,60.523 59.328,60.426 59.328,58.524 59.274,58.471 46.618,58.471 42.574,62.515 36.219,62.264 36.13,62.272 34.286,64.116 30.771,64.116
  region net AC-L: 175.671,60.659 178.355,60.659 178.531,60.125 178.531,57.929 178.023,56.79 175.197,56.79 174.61,57.378 174.981,57.749 174.981,59.801 174.934,59.848 175.773,60.687
  region net AC-L: 111.656,60.482 112.805,60.482 113.326,59.962 113.326,57.603 113.583,57.346 110.775,57.346 111.395,57.966 111.395,60.222
  region net AC-L: 126.823,60.386 126.88,60.443 128.485,60.443 128.769,60.158 128.769,57.746 129.17,57.346 126.306,57.346 126.823,57.863
  region net AC-L: 88.282,55.196 89.775,55.196 89.793,55.178 89.793,47.192 88.403,47.192 88.282,47.313
  region net AC-L: 151.876,60.514 153.722,60.514 154.287,59.949 154.287,57.696 154.637,57.346 151.232,57.346 151.876,57.99
  region net AC-L: 164.026,60.413 165.827,60.413 166.441,59.798 166.441,57.955 167.05,57.346 163.362,57.346 163.918,57.901 163.918,60.305
Bottom Layer:
  region net NetCN1_1: 176.627,22.367 173.568,22.367 173.568,20.126 176.627,20.126
  region net NetK2_2: 85.977,69.648 85.977,71.184 82.129,71.184 82.129,69.648
  region net NetK2_2: 82.388,69.546 82.388,70.767 81.712,70.767 81.712,69.546
  region net NetK2_2: 86.39,69.874 86.39,70.688 85.776,70.688 85.776,69.874
  region net NetK2_2: 86.466,70.695 85.977,71.184 85.632,70.839 86.121,70.35
  region net NetK2_2: 82.05,71.105 81.712,70.767 82.05,70.429 82.388,70.767
  region net NetC6_2: 145.81,9.504 145.81,7.942 148.633,7.942 148.633,9.504
  region net NetC6_2: 148.5,8.848 148.5,8.25 148.941,8.25 148.941,8.848
  region net NetC6_2: 145.48,8.917 145.48,8.26 146.479,8.26 146.479,8.917
  region net AC-N: 25.214,67.976 25.214,68.055 22.229,71.039 0.979,71.039 0.155,70.215 0.155,47.716 1.017,46.853 4.092,46.853 4.092,50.412 4.101,50.421 2.488,52.033 2.488,57.348 2.414,57.422 4.396,59.403 4.396,64.553 6.14,66.297 21.902,66.297 22.983,65.216 25.199,65.216 25.406,65.422 25.406,67.778 25.212,67.972
  region net NetBD1_2: 18.185,59.458 17.065,60.578 9.249,60.578 9.097,60.425 9.097,57.637 10.159,56.574 10.159,50.942 9.2,49.983 7.711,49.983 7.407,49.679 7.407,46.758 7.793,46.372 10.16,46.372 10.16,46.629 10.341,46.81 10.341,48.317 10.404,48.317 11.902,49.814 16.647,49.814 17.432,50.599 17.432,51.701 11.582,57.551 15.972,57.551 16.095,57.427 18.185,57.427
  region net NetBD1_4: 4.29,40.258 1.292,40.258 0.572,39.538 0.572,26.259 1.041,25.79 3.509,25.79 4.29,26.57
  region net NetBD1_1: 7.688,40.268 9.512,40.268 11.859,37.911 13.973,37.911 14.548,37.336 14.548,32.33 14.548,30.475 10.129,30.289 9.824,30.289 9.152,30.289 7.687,30.289 7.501,30.475 7.688,30.662
  region net NetC1_2: 12.793,23.232 14.772,23.232 14.772,20.519 14.755,20.501 12.924,20.501 11.269,18.847 7.171,18.847 7.171,20.535 7.153,20.554 7.344,20.745 9.224,20.745 9.224,20.768 11.688,23.232 14.772,23.232
  region net NetC1_2: 12.582,28.689 15.357,28.689 15.691,28.354 8.231,20.894 7.139,20.894 7.139,23.246
  region net NetC1_2: 33.83,32.658 35.707,30.781 35.707,25.683 37.425,23.965 37.116,23.656 37.116,22.518 34.649,22.518 34.412,22.756 34.412,27.465 32.25,29.627 18.297,29.627 15.57,26.9 14.237,26.9 14.237,28.404 14.333,28.5 14.669,28.5 18.827,32.658
  region net GSS: 2.195,23.661 3.879,23.661 3.959,23.741 3.959,9.616 9.194,4.381 18.977,4.381 20.041,3.317 20.041,2.713 7.365,2.713 2.1,7.978 2.1,23.725 2.195,23.82
  region net NetR13_2: 9.217,7.592 12.108,7.592 12.382,7.318 12.382,6.412 13.391,5.403 9.806,5.403 9.806,5.525 9.068,6.264 9.217,6.413
  region net NetR15_1: 24.072,9.513 24.223,9.362 24.223,6.911 23.999,6.688 23.943,6.744 13.985,6.744 13.985,8.801 14.696,9.513
  region net NetD3_K: 23.068,19.307 24.032,18.343 24.032,15.72 24.026,15.714 22.472,15.714 20.446,17.74 20.358,17.652 15.744,17.652 15.744,18.092 16.959,19.307
  region net GSS: 16.691,16.761 18.544,16.761 18.544,14.314 18.988,13.871 16.086,13.871 16.589,14.374 16.589,16.659
  region net NetR13_2: 35.107,12.467 35.13,12.444 37.155,12.444 37.155,6.233 36.207,5.285 34.125,5.285 34.914,6.074 34.914,12.274
  region net NetBD2_4: 34.058,58.956 39.067,58.956 49.339,69.228 49.45,69.117 59.321,69.117 59.321,66.535 59.432,66.424 59.393,66.385 50.115,66.385 50.115,66.326 39.936,56.148 33.763,56.148 33.763,58.661
  region net NetBD2_1: 33.859,51.336 43.867,51.336 49.451,56.92 59.377,56.92 59.377,54.562 59.465,54.474 52.86,54.474 46.976,48.589 33.859,48.589
  region net AC-L: 21.43,59.288 23.227,59.288 23.241,59.274 23.241,47.372 26.697,43.917 26.612,43.832 26.612,39.198 21.775,39.198 19.836,41.137 19.836,44.83 21.308,46.302 21.308,59.166
  region net AC-L: 26.697,43.917 55.289,43.917 56.051,43.155 55.916,43.019 55.916,39.198 26.324,39.198 26.297,39.224 26.612,39.539 26.612,43.832
  region net AC-L: 55.818,43.262 55.964,43.409 73.049,43.409 73.049,39.366 72.879,39.196 55.486,39.196 55.485,39.198 55.485,42.901 55.832,43.249
  region net AC-L: 62.447,43.155 65.994,46.702 67.197,46.702 68.631,45.268 74.922,45.268 78.421,41.768 78.421,30.958 78.293,30.83 75.578,30.83 75.578,37.304 73.516,39.366 73.049,39.366 73.049,41.474 71.368,43.155
  region net AC-L: 78.146,41.729 78.183,41.692 87.991,41.692 88.323,42.023 88.323,55.435 89.478,55.435 89.783,55.74 89.783,29.394 89.631,29.243 90.251,28.623 90.859,28.623 91.07,28.413 91.086,28.429 94.037,28.429 94.037,26.453 93.93,26.346 93.594,26.682 88.438,26.682 88.438,26.981 87.523,27.896 87.523,37.825 86.696,38.652 86.681,38.636 79.083,38.636 78.359,37.912 78.153,38.118 78.153,41.719
  region net NetKG3_1: 104.377,70.649 104.529,70.498 108.643,70.498 108.148,62.148 107.645,59.908 107.645,53.513 102.852,53.513 103.136,53.797 103.136,61.183 103.278,61.183 104.377,62.282 104.059,62.601 104.059,70.664
  region net NetKG12_1: 117.872,70.983 120.57,70.983 120.97,70.583 120.97,61.858 123.266,59.562 123.198,59.493 123.198,53.52 118.251,53.52 117.775,53.996 117.775,59.119 118.251,60.583 116.688,62.546 116.903,70.605 117.504,71.207
  region net H2: 94.305,71.139 94.514,70.93 97.861,70.93 97.861,40.422 99.28,39.004 99.566,30.087 99.28,29.361 98.557,28.848 97.861,28.714 97.213,28.788 96.431,29.57 96.431,35.297 93.593,38.135 93.593,70.427
  region net NetK6_2: 125.384,70.605 133.06,70.605 133.851,69.814 133.851,63.629 134.471,63.01 134.471,60.409 132.066,60.409 131.911,60.564 131.911,64.955 130.548,66.318 125.096,66.318 125.096,70.6 125.084,70.612 125.401,70.612 125.406,70.608 125.432,70.608
  region net NetK5_2: 144.656,70.733 152.52,70.733 152.608,70.645 152.542,70.579 152.542,66.676 147.956,66.676 146.716,65.436 146.716,60.869 146.642,60.795 146.602,60.835 144.504,61.608 144.3,70.376
  region net NetK4_2: 156.643,70.647 165.061,70.647 165.061,66.758 164.941,66.638 159.95,66.638 158.742,65.43 158.742,60.377 156.821,60.377 156.821,60.701 156.418,61.103 156.335,70.339
  region net NetK3_2: 169.388,70.48 177.48,70.48 177.48,66.798 177.391,66.71 172.872,66.71 171.13,64.968 171.13,60.581 170.906,60.357 168.957,60.357 168.374,60.94 168.374,62.94 168.815,63.381 168.815,69.907
  region net NetD5_A: 66.011,33.622 66.986,33.622 67.655,32.952 67.655,29.04 67.578,28.964 64.977,28.964 64.591,29.35 64.591,32.075 66.011,33.495
  region net NetR1_1: 78.529,9.143 80.218,9.143 80.678,8.682 83.781,8.682 84.677,7.786 84.677,4.272 78.619,4.272 78.529,4.361
  region net +5V: 83.268,16.923 90.359,16.923 95.787,11.495 95.985,11.495 95.985,9.276 95.819,9.11 93.985,10.945 83.382,10.945 83.199,11.128 83.199,16.855
  region net GND: 101.204,7.063 102.765,5.502 102.765,4.761 100.001,4.761 97.435,2.195 87.166,2.195 87.998,3.027 87.901,3.123 87.901,7.61 87.962,7.671 88.571,7.063
  region net +5V: 83.402,15.006 83.086,15.006 81.567,13.487 81.567,11.703 82.325,10.945 83.382,10.945 83.382,14.989 83.398,15.005
  region net GND: 77.221,15.882 77.355,15.749 77.355,14.756 77.472,14.756 79.627,12.6 79.627,12.357 76.904,12.357 76.49,12.771 76.49,15.882
  region net GND: 73.331,15.998 73.446,15.882 76.49,15.882 76.49,12.771 76.241,12.771 73.248,15.764 73.248,15.915 73.317,15.984
  region net NetK1_2: 64.106,56.618 66.304,56.618 66.404,56.718 66.438,56.685 66.438,53.257 59.691,46.51 58.472,46.51 57.505,46.853 57.288,47.069 57.387,46.97 57.261,49.229 59.715,49.229 64.106,53.62
  region net NetBD2_2: 63.998,66.936 64.002,66.932 66.359,66.932 66.359,62.757 66.184,62.582 66.07,62.696 57.106,62.696 57.106,64.093 57.308,64.295 63.134,64.295 63.998,65.159
  region net NetK2_2: 82.047,69.874 86.39,69.874 86.39,60.912 84.503,59.025 84.503,52.307 84.503,45.626 84.206,44.838 81.867,44.838 81.712,44.994 81.712,69.545

## Silkscreen, mask and mechanical layers (free items; w line width, h text height)
Top Overlay:
  circle w0.127: c39.25,12.938 r1.6
  lines w0.127: 36.82,12.938 41.68,12.938 ; 36.82,68.078 41.68,68.078 ; 39.25,10.508 39.25,15.368 ; 39.25,65.648 39.25,70.508 ; 97.731,30.153 179.533,30.153 ; 136.82,12.938 141.68,12.938 ; 136.82,68.078 141.68,68.078 ; 139.25,10.508 139.25,15.368 ; 139.25,65.648 139.25,70.508
  text "三通阀1" at 128.169,73.342 h2
  text "等离子" at 169.912,73.315 h2
  text "三通阀2" at 144.108,73.243 h2
  text "两通阀" at 157.484,73.217 h2
  text "小水泵" at 114.938,63.975 h2 r90
  text "大水泵" at 111.31,63.957 h2 r90
  text "咖啡煲" at 88.733,63.656 h2 r90
  text "蒸汽煲" at 100.274,63.526 h2 r90
  text "负" at 29.794,56.946 h2
  text "磨豆机" at 26.505,54.543 h2
  text "正" at 29.367,49.079 h2
  text "YM0301-P" at 32.913,40.683 h2
  text "2024.6.15" at 33.591,36.469 h2
  text "V1.0" at 48.373,36.35 h2
  text "压力计" at 173.696,30.742 h2
  text "5V" at 170.605,27.06 h1
  text "GND" at 170.202,23.9 h1
  text "5V" at 152.722,10.576 h1 r90
  text "GND" at 150.013,10.482 h1 r90
  text "5V" at 156.219,9.792 h1
  text "GND" at 158.494,9.734 h1
  text "RX" at 162.034,9.733 h1
  text "TX" at 164.372,9.61 h1
  text "NTC1" at 130.085,9.3 h1
  text "NTC2" at 138.748,9.171 h1
  text "5V" at 116.284,8.598 h1 r90
  text "RX" at 121.497,8.502 h1 r90
  text "TX" at 123.928,8.402 h1 r90
  text "GND" at 119.143,8.2 h1 r90
  text "流量计" at 147.808,7.95 h2
  text "通信" at 159.669,7.819 h2
  text "烧录" at 109.356,2.273 h2
Bottom Solder:
  lines w0.4: 167.275,33.66 169.214,33.66 167.513,35.36 167.49,35.36 ; 167.49,40.155 167.49,40.198 169.281,41.99 167.556,41.99 ; 167.957,33.964 167.957,34.35 168.405,33.903 167.712,33.903 167.681,33.872 167.681,34.872 168.681,33.872 168.699,33.872 ; 168.327,41.547 168.286,41.506 167.936,41.506 167.667,41.238 168.198,41.238 168.502,41.541 168.502,41.53 167.632,40.66 167.632,41.536 167.591,41.577 167.603,41.577 167.807,41.781 168.823,41.781
  lines w1: 11.762,51.164 16.551,51.164 ; 86.916,40.476 87.664,40.476 88.866,41.678 ; 88.656,40.411 88.656,40.728 ; 89.194,38.949 89.194,55.951
  lines w1.8: 27.404,41.21 27.684,41.49 ; 74.102,41.49 75.426,40.165 ; 83.27,46.259 83.27,65.17 ; 84.152,15.814 84.152,11.808 84.191,11.768 93.972,11.768 94.168,11.572 ; 87.618,40.165 88.669,39.114 ; 87.883,13.261 88.807,14.184 90.456,14.184 90.044,14.596 86.548,14.596 88.591,14.596 89.965,13.222 91.222,13.222 ; 88.669,28.435 89.706,27.398 92.552,27.398 ; 92.755,12.395 86.275,12.395 86.275,13.995 84.399,15.871 90.036,15.871 95.512,10.395 ; 95.598,63.466 95.271,63.138 95.271,39.976 97.862,37.384 97.862,30.434
  lines w2: 76.864,32.107 76.864,38.935 ; 88.669,28.435 88.669,39.114
  lines w2.5: 27.684,41.49 74.102,41.49 ; 75.426,40.165 87.618,40.165 ; 75.808,39.992 76.864,38.935
Mechanical 4:
  circle w0.064: c138.061,14.008 r0.032
  circle w0.064: c140.439,11.868 r0.032

## Text inside footprints (layer, text, board x,y; h text height)
D1: Bottom Overlay "+" at 59.01,23.203 h1 r90; Bottom Overlay "-" at 59.01,17.527 h1 r90
D2: Bottom Overlay "+" at 31.143,24.615 h1; Bottom Overlay "-" at 25.467,24.615 h1
D3: Bottom Overlay "+" at 11.288,11.591 h1 r270; Bottom Overlay "-" at 11.288,15.274 h1 r270
D4: Bottom Overlay "+" at 80.635,26.979 h1; Bottom Overlay "-" at 76.952,26.979 h1
D5: Bottom Overlay "+" at 65.099,31.473 h1; Bottom Overlay "-" at 61.416,31.473 h1
D6: Bottom Overlay "+" at 72.016,63.575 h1 r90; Bottom Overlay "-" at 72.016,59.892 h1 r90
EC1: Top Overlay "+" at 97.64,11.723 h2.5 r90
EC2: Top Overlay "+" at 72.727,12.223 h1 r90
EC3: Top Overlay "+" at 64.032,12.178 h1 r90
EC4: Top Overlay "+" at 11.231,18.883 h1
EC5: Top Overlay "+" at 11.258,30.335 h1
EC6: Top Overlay "+" at 18.968,20.827 h1 r90
T1: Top Overlay "7" at 52.024,24.478 h1; Top Overlay "1" at 38.024,22.878 h1; Top Overlay "G" at 38.124,13.678 h1; Bottom Overlay "7" at 52.724,24.478 h1; Bottom Overlay "1" at 38.424,22.978 h1; Bottom Overlay "G" at 39.024,13.678 h1